# Altium PCB PCB1.PcbDoc
Units mm, origin at the board's own origin, x right, y up, seen from the top; angles counter-clockwise.
Board outline 44.5 x 47.5 mm, 2 copper layers (Top Layer, Bottom Layer); 62 components, 63 nets, 204 pads, 38 vias.
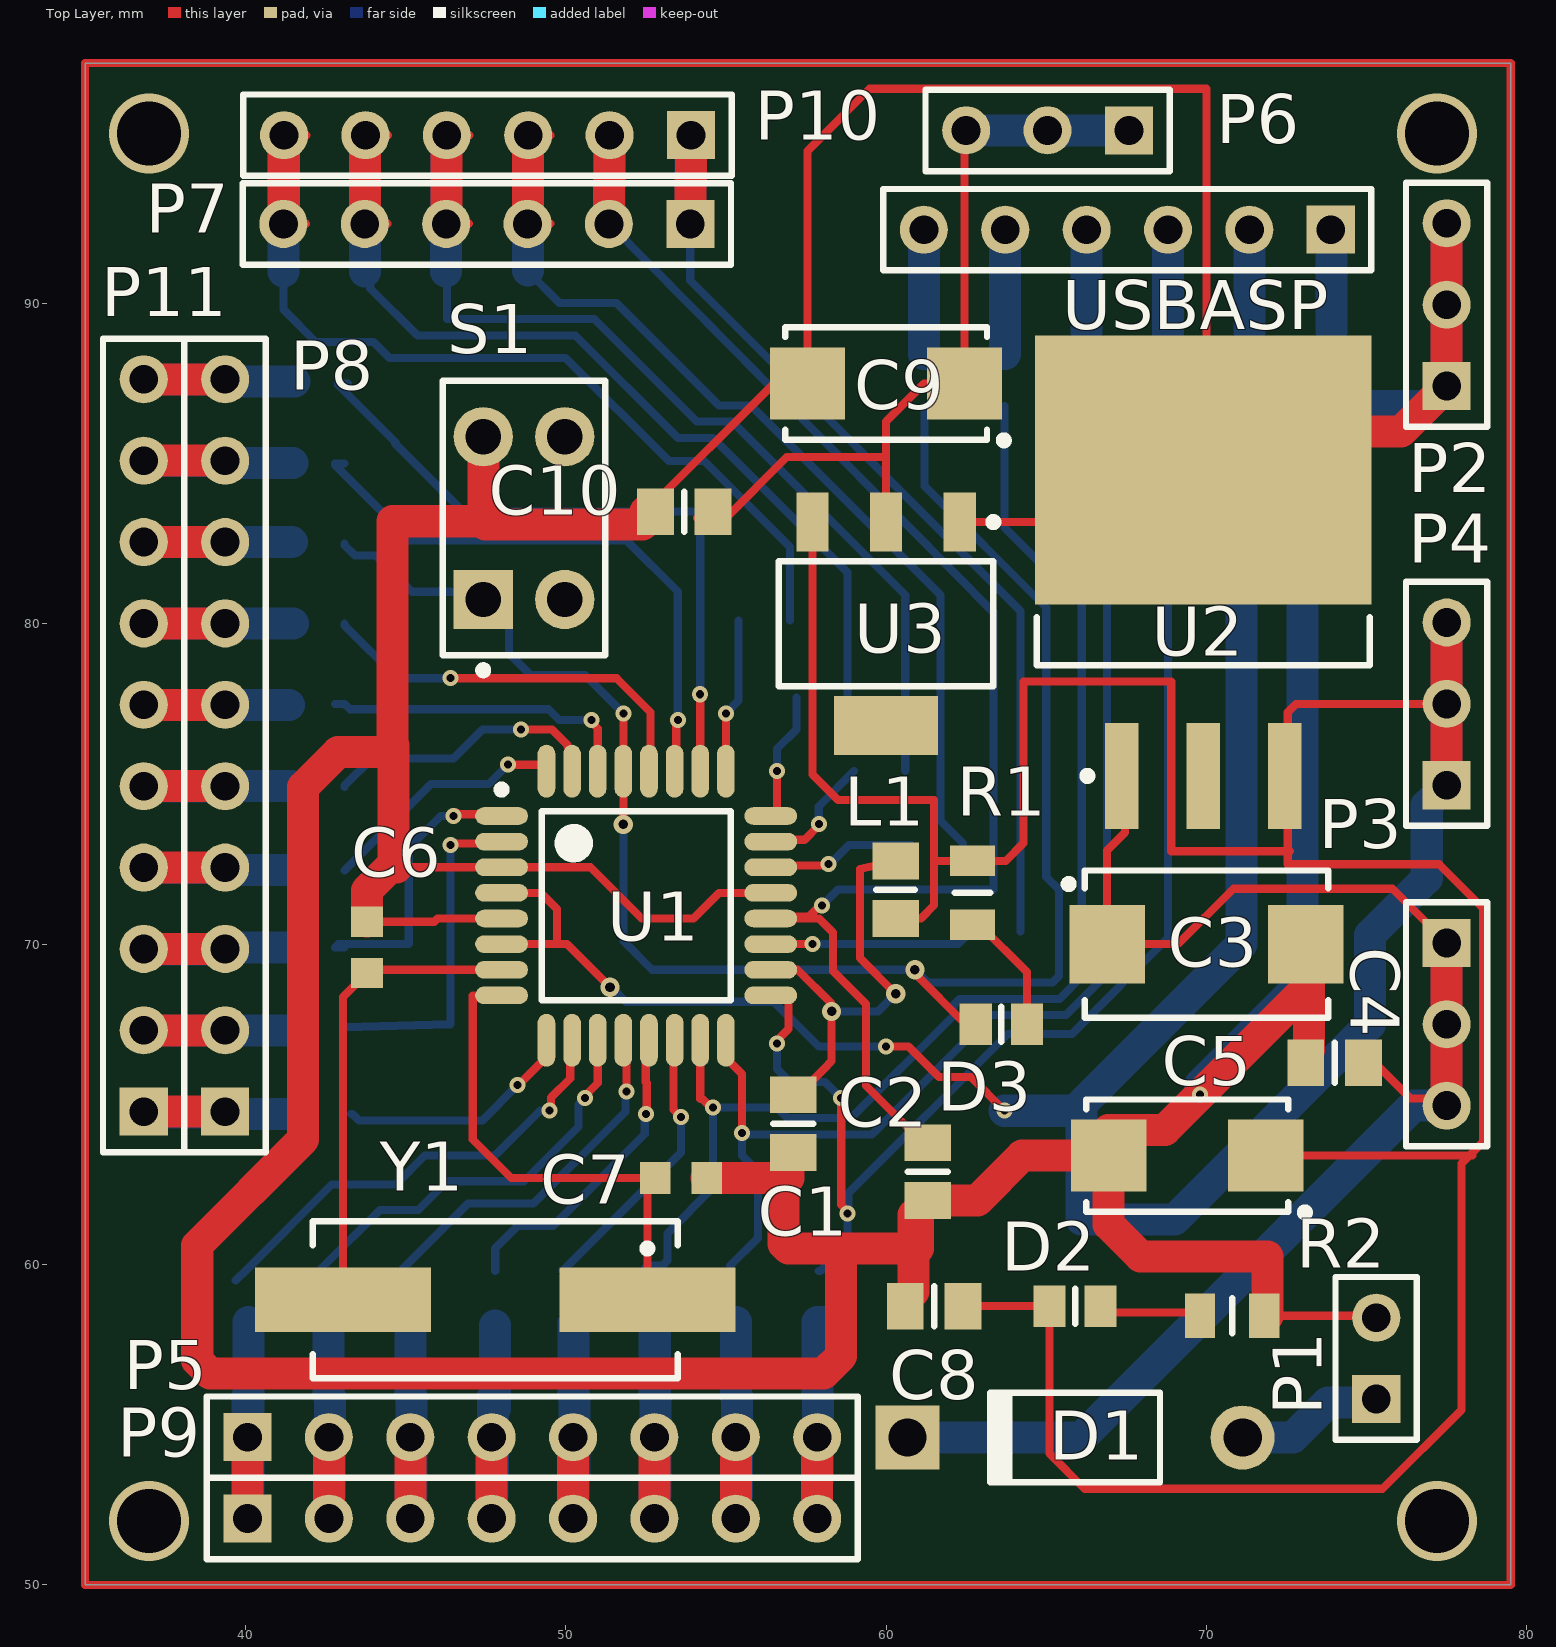
[diagram p0: Top Layer view]
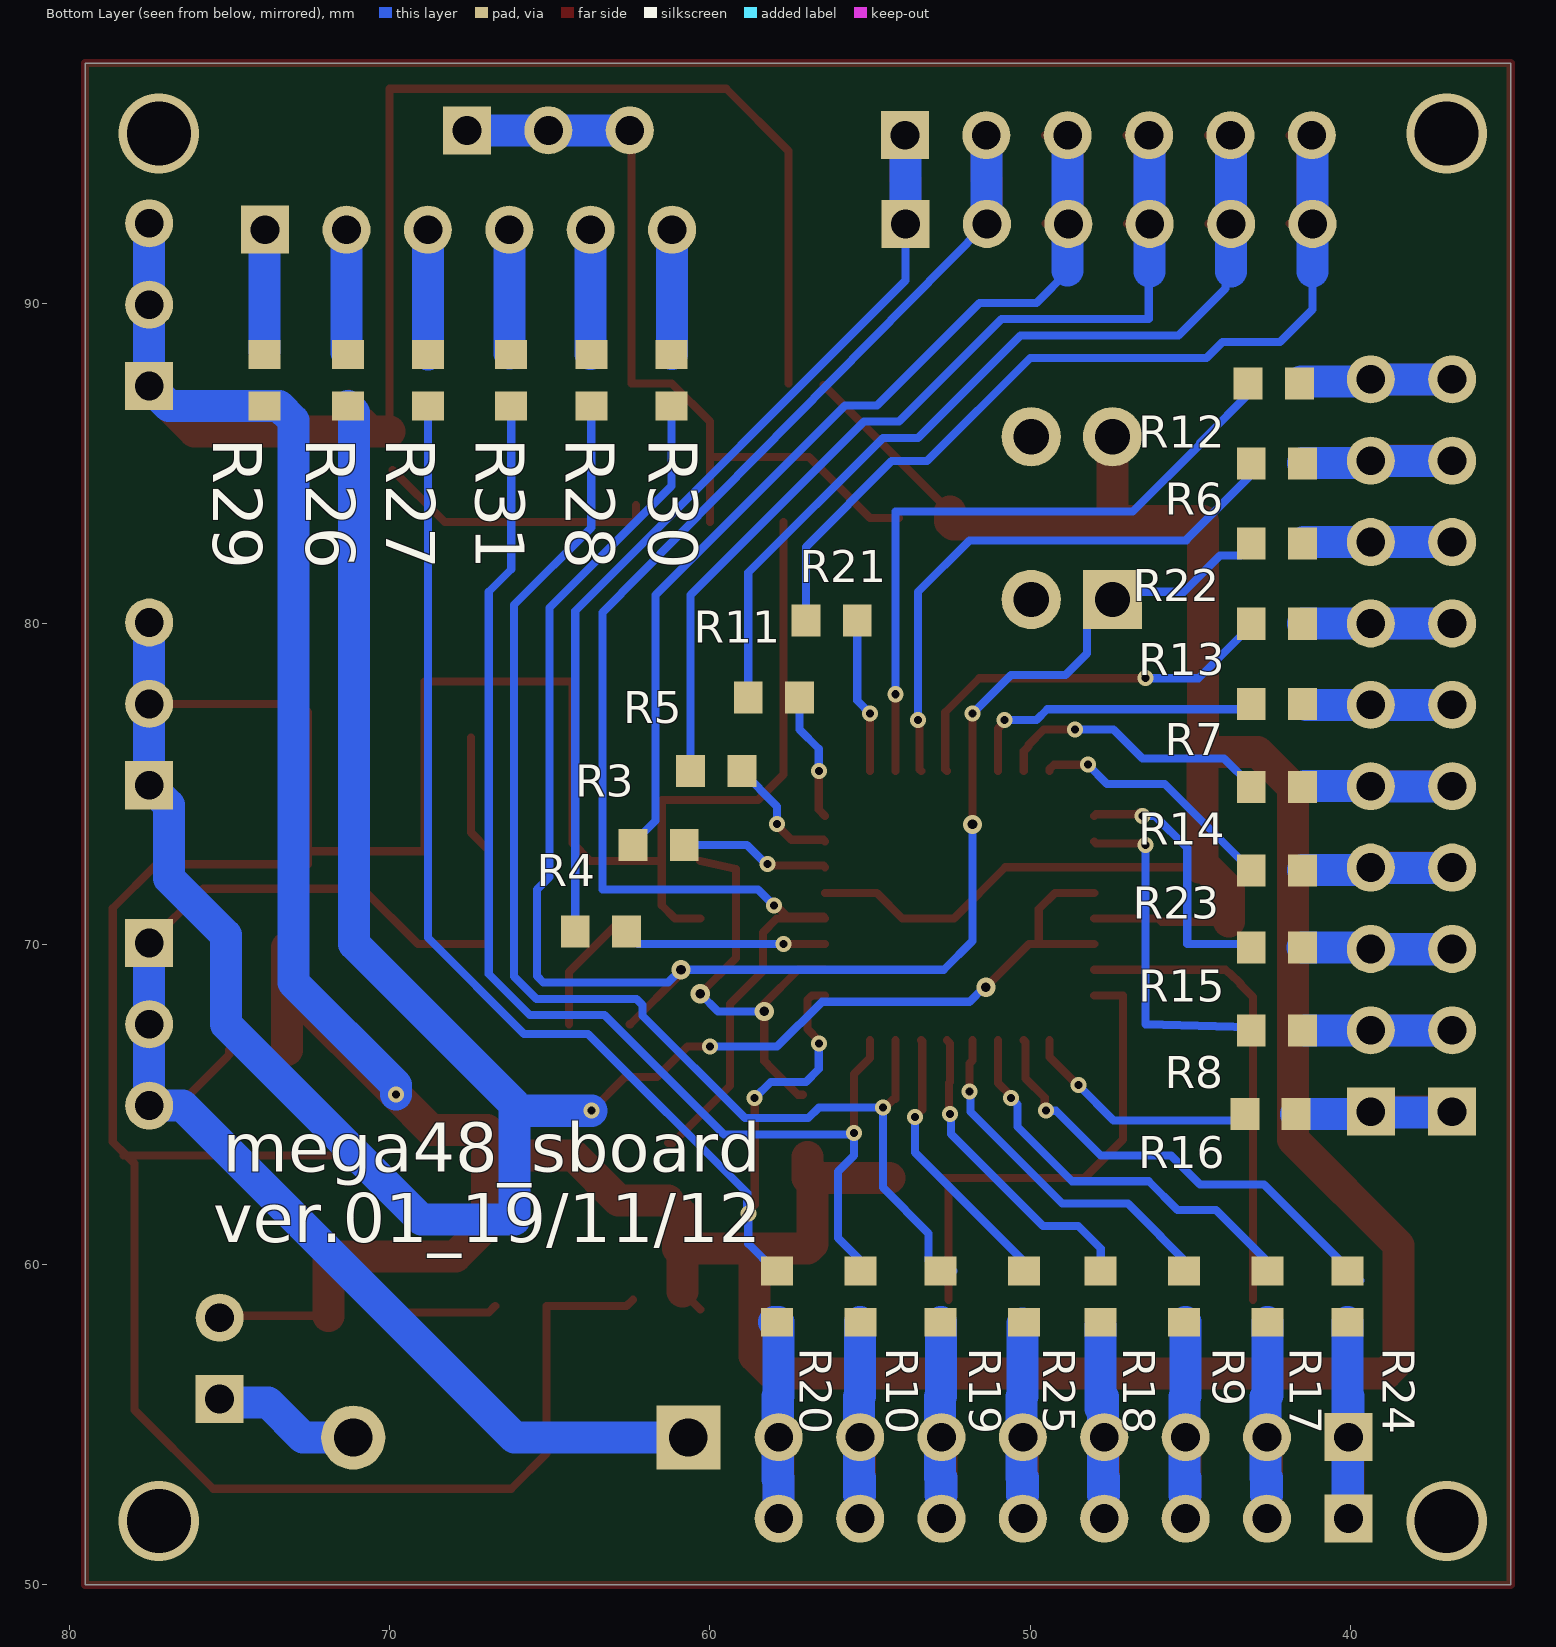
[diagram p1: Bottom Layer view, seen from below]
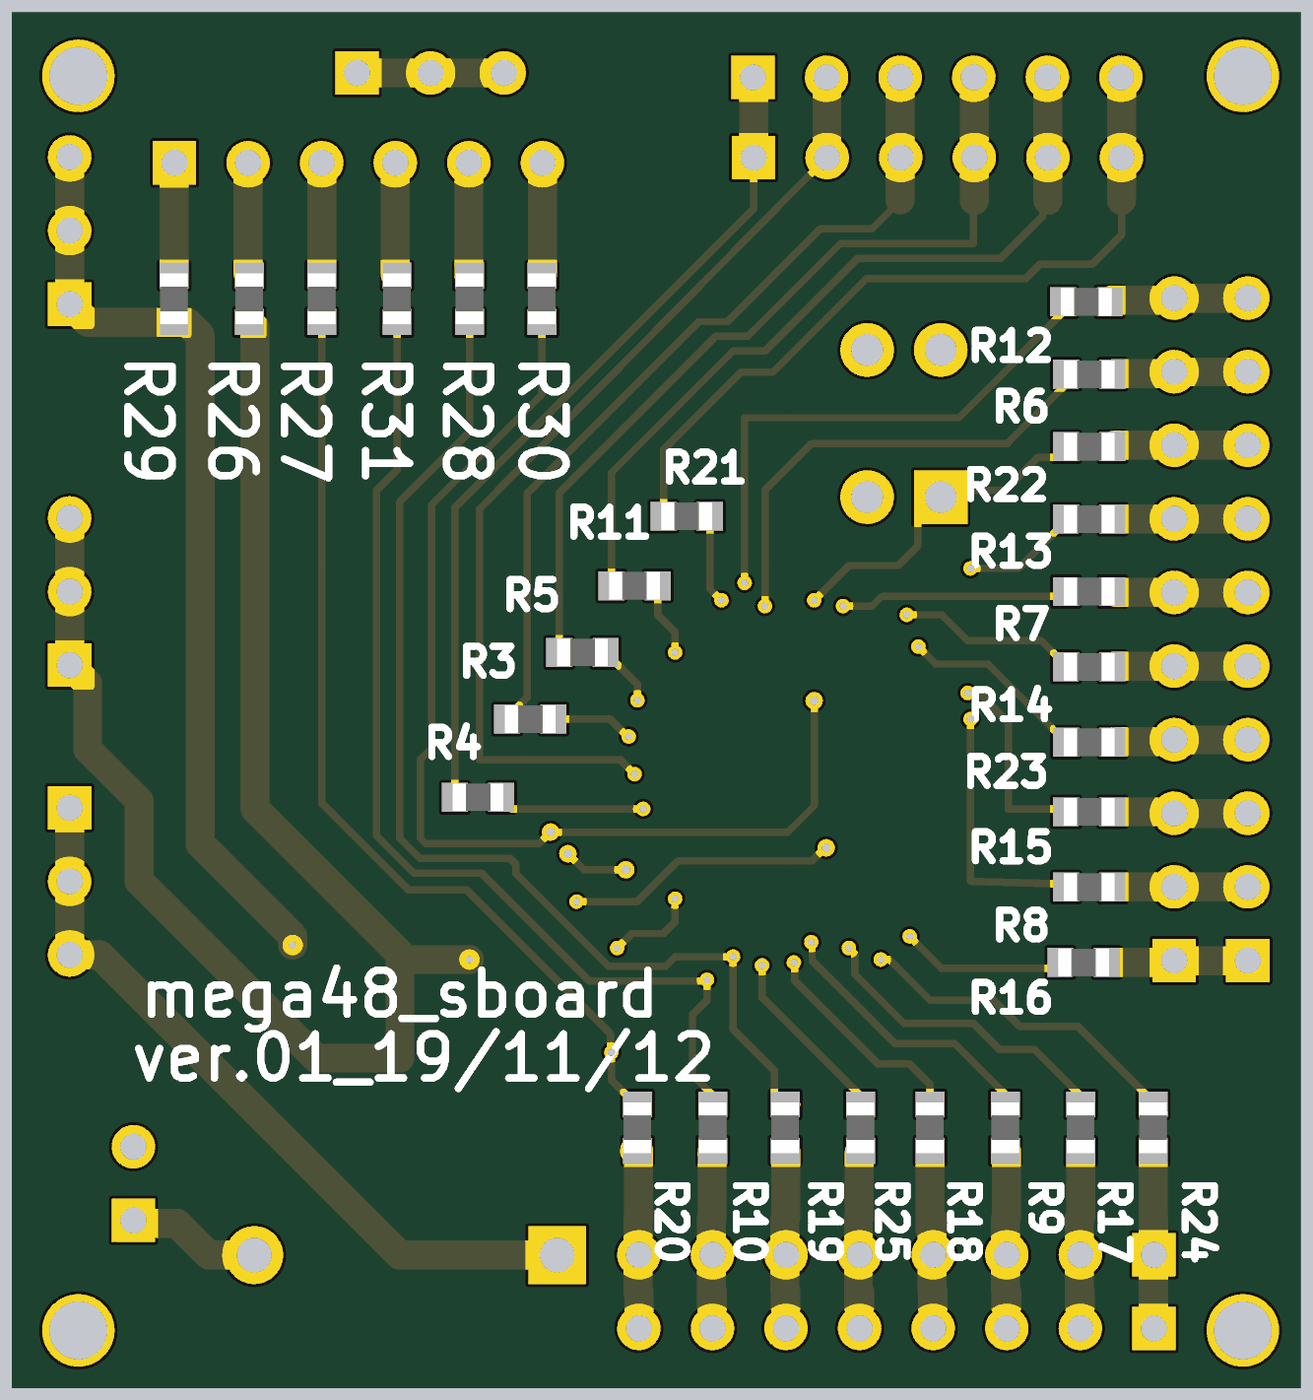
[diagram p2: 3D render of the assembled board from below, using the file's embedded part models]

## Layer stack, top to bottom
Top Solder: solder mask 0.0102, Solder Resist, Dk 3.5
Top Layer: signal copper 0.0356
Dielectric 1: dielectric 0.32, FR-4, Dk 4.8
Bottom Layer: signal copper 0.0356
Bottom Solder: solder mask 0.0102, Solder Resist, Dk 3.5

## Board outline
35,50 35,97.5 79.5,97.5 79.5,50

## Design rules (kind name [scope] priority, off if disabled: settings)
Clearance [All] p1: gap=0.254 ignorepadtopadclearanceinfootprint=FALSE except(0: Arc-Hole Track-Hole SMDPad-Hole THPad-Hole Via-Hole Fill-Hole Poly-Hole Region-Hole Text-Hole)
PolygonConnect [All] p1: connectstyle=Relief reliefconductorwidth=0.254 reliefentries=4 polygonreliefangle="90 Angle" airgapwidth=0.254
RoutingVias [All] p1: holewidth=0.711 width=1.27 viastyle="Through Hole" minholewidth=0.25 minwidth=0.5 maxholewidth=2.5 maxwidth=3
SolderMaskExpansion [All] p1: expansion=0.102
Width [All] p1: maxlimit=1.5 minlimit=0.254 preferedwidth=0.254
30 further rules are at their usual default settings.

## Components (designator, comment, footprint, x,y, rotation, side; value= is the part's Value field where it differs from the comment)
C1 "150nF" CAPC2013X100N 57.1,64.4 r270 top
C2 "150nF" CAPC2013X100N 61.3,62.9 r270 top
C3 "33uF" CAPMP7343X310N 70,70 r0 top
C4 "150nF" CAPC2013X100N 74,66.3 r180 top
C5 "47uF" CAPMP6032X280N 69.4,63.4 r180 top
C6 "22pF" CAPC1608X87N 43.8,69.9 r90 top
C7 "22pF" CAPC1608X87N 53.6,62.7 r0 top
C8 "150nF" CAPC2013X100N 61.5,58.7 r180 top
C9 "47uF" CAPMP6032X280N 60,87.5 r180 top
C10 "150nF" CAPC2013X100N 53.7,83.5 r180 top
D1 "1N4007" DO-41 65.9,54.6 r180 top
D2 "LED2" 6-0805_L 65.9,58.7 r0 top
D3 "LED2" 6-0805_L 63.6,67.5 r180 top
L1 "10uH" INDC2012X105N 60.3,71.7 r270 top
P1 "Header 2" HDR1X2 75.3,55.8 r90 top
P2 "Header 3" HDR1X3 77.5,87.42 r90 top
P3 "Header 3" HDR1X3 77.5,70.04 r270 top
P4 "Header 3" HDR1X3 77.5,74.96 r90 top
P5 "Header 8" HDR1X8 40.07,54.61 r0 top
P6 "Header 3" HDR1X3 67.58,95.4 r180 top
P7 "Header 6" HDR1X6 53.89,92.48 r180 top
P8 "Header 10" HDR1X10 39.37,64.77 r90 top
P9 "Header 8" HDR1X8 40.07,52.07 r0 top
P10 "Header 6" HDR1X6 53.91,95.25 r180 top
P11 "Header 10" HDR1X10 36.83,64.77 r90 top
R1 "3k3" RESC2012X60N 62.7,71.6 r90 top
R2 "3k3" RESC2012X60N 70.8,58.4 r0 top
R3 "100" RESC1608X55N 61.6,73.1 r0 bottom
R4 "100" RESC1608X55N 63.4,70.4 r0 bottom
R5 "100" RESC1608X55N 59.8,75.4 r0 bottom
R6 "100" RESC1608X55N 42.3,85 r180 bottom
R7 "100" RESC1608X55N 42.3,77.5 r180 bottom
R8 "100" RESC1608X55N 42.3,67.3 r180 bottom
R9 "100" RESC1608X55N 45.2,59 r270 bottom
R10 "100" RESC1608X55N 55.3,59 r270 bottom
R11 "100" RESC1608X55N 58,77.7 r0 bottom
R12 "100" RESC1608X55N 42.4,87.5 r180 bottom
R13 "100" RESC1608X55N 42.3,80 r180 bottom
R14 "100" RESC1608X55N 42.3,74.9 r180 bottom
R15 "100" RESC1608X55N 42.3,69.9 r180 bottom
R16 "100" RESC1608X55N 42.5,64.7 r180 bottom
R17 "100" RESC1608X55N 42.6,59 r270 bottom
R18 "100" RESC1608X55N 47.8,59 r270 bottom
R19 "100" RESC1608X55N 52.8,59 r270 bottom
R20 "100" RESC1608X55N 57.9,59 r270 bottom
R21 "100" RESC1608X55N 56.2,80.1 r0 bottom
R22 "100" RESC1608X55N 42.3,82.5 r180 bottom
R23 "100" RESC1608X55N 42.3,72.3 r180 bottom
R24 "100" RESC1608X55N 40.1,59 r270 bottom
R25 "100" RESC1608X55N 50.2,59 r270 bottom
R26 "1R8" RESC1608X55N 71.3,87.6 r90 bottom
R27 "10" RESC1608X55N 68.8,87.6 r90 bottom
R28 "10" RESC1608X55N 63.7,87.6 r90 bottom
R29 "1R8" RESC1608X55N 73.9,87.6 r90 bottom
R30 "10" RESC1608X55N 61.2,87.6 r90 bottom
R31 "10" RESC1608X55N 66.2,87.6 r90 bottom
S1 "SW-DPST" DPST-4 48.7,83.3 r90 top
U1 "ATmega48-20AU" 32A_N 52.2,71.2 r0 top
U2 "78M05" TS3B_N 69.9,81.3 r90 top
U3 "AMS1117" ADI-KC-3_N 60,80 r270 top
USBASP "Header 6" HDR1X6 73.88,92.3 r180 top
Y1 "HC49/4H_SMX" HC49/4H_SMX 47.8,58.9 r180 top

## Footprints (in the part's own frame and the unit in brackets; to place one, negate y for a bottom-side part, rotate by r counter-clockwise, add the part's x,y. Pads: shape width x height; smd on the part's side, far side on the other; paste and mask are expansions set on the pad)
6-0805_L [mm] "Chip Resistor, Body 2.0x1.2mm, IPC High Density"
  rect 1x1.3 smd: 1(-0.8,0) 2(0.8,0)
  silkscreen extent 0,-0.55 0,0.55, body extent -1.07,-0.7 1.07,0.7, height 0.7
32A_N [mm] "Thin QFP, 32-Leads, Body 7x7mm, Pitch 0.8mm, IPC Medium Density"
  oval 1.65x0.55 smd: 1(-4.2,2.8) 2(-4.2,2) 3(-4.2,1.2) 4(-4.2,0.4) 5(-4.2,-0.4) 6(-4.2,-1.2) 7(-4.2,-2) 8(-4.2,-2.8) 17(4.2,-2.8) 18(4.2,-2) 19(4.2,-1.2) 20(4.2,-0.4) 21(4.2,0.4) 22(4.2,1.2) 23(4.2,2) 24(4.2,2.8)
  oval 0.55x1.65 smd: 9(-2.8,-4.2) 10(-2,-4.2) 11(-1.2,-4.2) 12(-0.4,-4.2) 13(0.4,-4.2) 14(1.2,-4.2) 15(2,-4.2) 16(2.8,-4.2) 25(2.8,4.2) 26(2,4.2) 27(1.2,4.2) 28(0.4,4.2) 29(-0.4,4.2) 30(-1.2,4.2) 31(-2,4.2) 32(-2.8,4.2)
  silkscreen extent -4.32,-2.95 2.95,3.75, body extent -3.5,-3.5 3.5,3.5, height 1.2
ADI-KC-3_N [mm] "SOT223, 4-Leads, Body 6.5x3.5mm, Pitch 2.3mm, IPC Medium Density"
  rect 1.85x1 smd: 1(-3.175,2.3) 2(-3.175,0) 3(-3.175,-2.3)
  rect 1.85x3.25 smd: 4(3.175,0)
  silkscreen extent -3.3,-3.35 1.95,3.48, body extent -1.85,-3.35 1.85,3.35, height 1.8
CAPC1608X87N [mm] "Chip Capacitor, Body 1.6x0.8mm IPC Medium Density"
  rect 0.95x1 smd: 1(-0.8,0) 2(0.8,0)
  body extent -0.87,-0.47 0.88,0.48, height 0.87
CAPC2013X100N [mm] "Capacitor, Non-Polarized, Chip; 2.00mm L X 1.25mm W X 0.9mm H, IPC Medium Density"
  rect 1.15x1.45 smd: 1(-0.9,0) 2(0.9,0)
  silkscreen extent 0,-0.63 0,0.62, body extent -1.1,-0.72 1.1,0.73, height 1
CAPMP6032X280N [mm] "Capacitor, Polarized, Molded  Body 6.0x3.2mm, IPC Medium Density"
  rect 2.35x2.25 smd: 1(-2.45,0) 2(2.45,0)
  silkscreen extent -3.8,-1.75 3.15,1.9, body extent -3.15,-1.75 3.15,1.75, height 2.8
CAPMP7343X310N [mm] "Capacitor, Polarized, Molded  Body 7.3x4.3mm, IPC Medium Density"
  rect 2.35x2.45 smd: 1(-3.1,0) 2(3.1,0)
  silkscreen extent -4.42,-2.3 3.8,2.3, body extent -3.8,-2.3 3.8,2.3, height 3.1
DO-41 [mm] "Diode, Axial; Body 5.2 x 2.7 mm (LxDia. max), Lead Dia. 0.86 mm (max)"
  round 2 hole 1.2: 1(-5.23,0)
  rect 2x2 hole 1.2: 2(5.23,0)
  silkscreen extent -2.65,-1.4 2.75,1.4
DPST-4 [mm] "Switch; 4 Leads"
  rect 1.85x1.85 hole 1.1: 1(-2.54,1.27)
  round 1.85 hole 1.1: 2(-2.54,-1.27) 3(2.54,-1.27) 4(2.54,1.27)
  silkscreen extent -4.88,-2.54 4.28,2.54
HC49/4H_SMX [mm] "Surface Mount Quartz Crystal; Body 13.4 (inc. leads) x 4.9 mm (LxW max)"
  rect 5.5x2 smd: 1(-4.75,0) 2(4.75,0)
  silkscreen extent -5.7,-2.45 5.7,2.45
HDR1X2 [mm] "Connector; Header; 2 Position"
  rect 1.5x1.5 hole 0.9: 1(0,0)
  round 1.5 hole 0.9: 2(2.54,0)
  silkscreen extent -1.27,-1.27 3.81,1.27
HDR1X3 [mm] "Connector; Header; 3 Position"
  rect 1.5x1.5 hole 0.9: 1(0,0)
  round 1.5 hole 0.9: 2(2.54,0) 3(5.08,0)
  silkscreen extent -1.27,-1.27 6.35,1.27
HDR1X6 [mm] "Connector; Header; 6 Position"
  rect 1.5x1.5 hole 0.9: 1(0,0)
  round 1.5 hole 0.9: 2(2.54,0) 3(5.08,0) 4(7.62,0) 5(10.16,0) 6(12.7,0)
  silkscreen extent -1.27,-1.27 13.97,1.27
HDR1X8 [mm] "Connector; Header; 8 Position"
  rect 1.5x1.5 hole 0.9: 1(0,0)
  round 1.5 hole 0.9: 2(2.54,0) 3(5.08,0) 4(7.62,0) 5(10.16,0) 6(12.7,0) 7(15.24,0) 8(17.78,0)
  silkscreen extent -1.27,-1.27 19.05,1.27
HDR1X10 [mm] "Connector; Header; 10 Position"
  rect 1.5x1.5 hole 0.9: 1(0,0)
  round 1.5 hole 0.9: 2(2.54,0) 3(5.08,0) 4(7.62,0) 5(10.16,0) 6(12.7,0) 7(15.24,0) 8(17.78,0) 9(20.32,0) 10(22.86,0)
  silkscreen extent -1.27,-1.27 24.13,1.27
INDC2012X105N [mm] "Chip Inductor, EIA 0805, Metric 2012, Body 2.0x1.25mm, IPC Medium Density"
  rect 1.15x1.45 smd: 1(-0.9,0) 2(0.9,0)
  silkscreen extent 0,-0.6 0,0.6, body extent -1.1,-0.7 1.1,0.7, height 1.1
RESC1608X55N [mm] "Chip Resistor, EIA 0603, Metric 1608, Body 1.6x0.8mm, IPC Medium Density"
  rect 0.9x1 smd: 1(-0.8,0) 2(0.8,0)
  body extent -0.87,-0.47 0.88,0.48, height 0.55
RESC2012X60N [mm] "Chip Resistor, EIA 0805, Metric 2012, Body 2.0x1.2mm, IPC Medium Density"
  rect 0.95x1.4 smd: 1(-1,0) 2(1,0)
  silkscreen extent 0,-0.55 0,0.55, body extent -1.1,-0.67 1.1,0.68, height 0.6
TS3B_N [mm] "D2-PAK, 4-Leads, Body 8.6x10.2mm, Pitch 2.54mm, Lead Span 14.2mm, IPC Medium Density"
  rect 3.3x1.05 smd: 1(-6.05,2.54) 2(-6.05,0) 3(-6.05,-2.54)
  rect 8.4x10.5 smd: 4(3.5,0)
  silkscreen extent -6.17,-5.2 -1.1,5.2, body extent -2.6,-5.2 6.29,5.2, height 4.64

## Part data
C1 C2 C4 C8 C10: library part CC0805_150NF_50V_10%_X5R, "Non-polarised capacitor", Case=0805, Manufacturer=GENERIC, Manufacturer1 ComponentHeight=1mm, Manufacturer1 Example=TDK, Manufacturer1 Part Number=C2012X5R1H154K085AA, Tolerance=±10%, Voltage=50V, Author="CERN DEM JLC", Component Type=Standard, CreateDate=11.12.2014, HelpURL=\\cern.ch\dfs\Applications\Altium\Datasheets\CC0805_X5R_TDK_C.pdf, LatestRevisionDate=11.12.2014, Manufacturer Part Number=CC0805_150NF_50V_10%_X5R, Mounted=Yes, Part Description="SMD Multilayer Chip Ceramic Capacitor", Part Number=CC0805_150NF_50V_10%_X5R, Pin Count=2, Sense=No, SMD=Yes, Socket=No, Status="Not Recommended", TC=X5R
C3: library part CTE7343-31_33UF_35V_10%_LESR0300, "Polarised capacitor", Case=D, Manufacturer=GENERIC, Manufacturer1 ComponentHeight=3.1mm, Manufacturer1 Example=AVX, Manufacturer1 Part Number=TPSD336K035R0300, Tolerance=±10%, Voltage=35V, Author="CERN DEM JLC", Component Type=Standard, CreateDate=05.05.2008, HelpURL=\\cern.ch\dfs\Applications\Altium\Datasheets\CTE-LESR_AVX_TPS.pdf, LatestRevisionDate=20.01.2009, Manufacturer Part Number=CTE7343-31_33UF_35V_10%_LESR0300, Mounted=Yes, Part Description="Low ESR 0R3 Solid Tantalum Chip Capacitor", Part Number=CTE7343-31_33UF_35V_10%_LESR0300, Pin Count=2, Sense=No, SMD=Yes, Socket=No, Status=Preferred
C5 C9: library part CTE6032-28_47UF_10V_10%, "Polarised capacitor", Case=C, Manufacturer=GENERIC, Manufacturer1 ComponentHeight=2.8mm, Manufacturer1 Example=AVX, Manufacturer1 Part Number=TAJC476K010RNJ, Tolerance=±10%, Voltage=10V, Author="CERN DEM JLC", Component Type=Standard, CreateDate=03.07.2013, HelpURL=\\cern.ch\dfs\Applications\Altium\Datasheets\CTE_AVX_TAJ.pdf, LatestRevisionDate=03.07.2013, Manufacturer Part Number=CTE6032-28_47UF_10V_10%, Mounted=Yes, Part Description="Solid Tantalum Chip Capacitor", Part Number=CTE6032-28_47UF_10V_10%, Pin Count=2, Sense=No, SMD=Yes, Socket=No, Status=Preferred
C6 C7: library part CC0603_22PF_50V_5%_NP0, "Non-polarised capacitor", Case=0603, Manufacturer=GENERIC, Manufacturer1 ComponentHeight=0.87mm, Manufacturer1 Example=PHYCOMP, Manufacturer1 Part Number=223886715229, Tolerance=±5%, Voltage=50V, Author="CERN DEM JLC", Component Type=Standard, CreateDate=03.12.2007, HelpURL=\\cern.ch\dfs\Applications\Altium\Datasheets\CC0603_NP0_PHYCOMP.pdf, LatestRevisionDate=03.12.2007, Manufacturer Part Number=CC0603_22PF_50V_5%_NP0, Mounted=Yes, Part Description="SMD Multilayer Chip Ceramic Capacitor", Part Number=CC0603_22PF_50V_5%_NP0, Pin Count=2, Sense=No, SMD=Yes, Socket=No, Status=Preferred, TC=C0G/NP0
D1: "1.0 Ampere General Purpose Rectifier", PackageDocument=Aug-1999, Code_JEDEC=DO-204-AL, ComponentLink1Description="Manufacturer Link", ComponentLink1URL=http://www.fairchildsemi.com/, ComponentLink2Description="Pinout Specification", ComponentLink2URL=http://www.fairchildsemi.com/ds/1N%2F1N4001.pdf, DatasheetDocument=1998, LatestRevisionDate=17-Jul-2002, LatestRevisionNote="Re-released for DXP Platform.", PackageReference=DO-41, Published=8-Jun-2000, Publisher="Altium Limited"
D2 D3: "Typical RED, GREEN, YELLOW, AMBER GaAs LED", LatestRevisionDate=17-Jul-2002, LatestRevisionNote="Re-released for DXP Platform.", PackageDescription="SM LED; 2 Flat Leads", PackageReference=3.2X1.6X1.1, PackageVersion=Feb-2002, Published=8-Jun-2000, Publisher="Altium Limited"
L1: library part IND_10UH_10%_MURATA-PS_8200, "Inductor With Core", Manufacturer="MURATA POWER SOLUTIONS", Manufacturer Part Number=82103C, Power=500mA, Resistance=0.4R, Tolerance=±10%, Author="CERN DEM JLC", ComponentHeight=2.3mm, Component Type=Standard, CreateDate=21.07.2014, HelpURL=\\cern.ch\dfs\Applications\Altium\Datasheets\IND_MURATA-PS_8200.pdf, LatestRevisionDate=21.07.2014, Mounted=Yes, Part Description="Miniature Surface Mount Power Inductor (8200 Series)", Part Number=IND_10UH_10%_MURATA-PS_8200, Pin Count=2, Sense=No, SMD=Yes, Socket=No, Status=None
P1: "Header, 2-Pin", LatestRevisionDate=17-Jul-2002, LatestRevisionNote="Re-released for DXP Platform.", Publisher="Altium Limited"
P2 P3 P4 P6: "Header, 3-Pin", LatestRevisionDate=17-Jul-2002, LatestRevisionNote="Re-released for DXP Platform.", Publisher="Altium Limited"
P5 P9: "Header, 8-Pin", LatestRevisionDate=17-Jul-2002, LatestRevisionNote="Re-released for DXP Platform.", Publisher="Altium Limited"
P7 P10 USBASP: "Header, 6-Pin", LatestRevisionDate=17-Jul-2002, LatestRevisionNote="Re-released for DXP Platform.", Publisher="Altium Limited"
P8 P11: "Header, 10-Pin", LatestRevisionDate=17-Jul-2002, LatestRevisionNote="Re-released for DXP Platform.", Publisher="Altium Limited"
R1 R2: library part R0805_3K3_1%_0.125W_100PPM, "Resistor - 1%", Case=0805, Manufacturer=GENERIC, Manufacturer1 ComponentHeight=0.6mm, Manufacturer1 Example="NIC COMPONENT", Manufacturer1 Part Number=NRC10F3301TRF, Power=0.125W, Tolerance=±1%, Author="CERN DEM JLC", Component Type=Standard, CreateDate=03.12.2007, HelpURL=\\cern.ch\dfs\Applications\Altium\Datasheets\R0805_NIC_NRC.pdf, LatestRevisionDate=13.03.2008, Manufacturer Part Number=R0805_3K3_1%_0.125W_100PPM, Mounted=Yes, Part Description="General Purpose Thick Film Chip Resistor", Part Number=R0805_3K3_1%_0.125W_100PPM, Pin Count=2, Sense=No, SMD=Yes, Socket=No, Status=Preferred, TC=±100ppm/°C
R3 R4 R5 R6 R7 R8 R9 R10 R11 R12 R13 R14 R15 R16 R17 R18 R19 R20 R21 R22 R23 R24 R25: library part R0603_100R_1%_0.1W_100PPM, "Resistor - 1%", Case=0603, Manufacturer=GENERIC, Manufacturer1 ComponentHeight=0.55mm, Manufacturer1 Example="NIC COMPONENT", Manufacturer1 Part Number=NRC06F4700TRF, Power=0.1W, Tolerance=±1%, Author="CERN DEM JLC", Component Type=Standard, CreateDate=03.12.2007, HelpURL=\\cern.ch\dfs\Applications\Altium\Datasheets\R0603_NIC_NRC.pdf, LatestRevisionDate=13.03.2008, Manufacturer Part Number=R0603_100R_1%_0.1W_100PPM, Mounted=Yes, Part Description="General Purpose Thick Film Chip Resistor", Part Number=R0603_100R_1%_0.1W_100PPM, Pin Count=2, Sense=No, SMD=Yes, Socket=No, Status=Preferred, TC=±100ppm/°C
R26 R29: library part R0603_1R8_1%_0.1W_200PPM, "Resistor - 1%", Case=0603, Manufacturer=GENERIC, Manufacturer1 ComponentHeight=0.65mm, Manufacturer1 Example="YAGEO PHYCOMP", Manufacturer1 Part Number="232270461808L or RC0603FR-071R8L", Power=0.1W, Tolerance=±1%, Author="CERN DEM JLC", Component Type=Standard, CreateDate=03.12.2007, HelpURL=\\cern.ch\dfs\Applications\Altium\Datasheets\R0603_Phycomp_RC0603.pdf, LatestRevisionDate=17.10.2012, Manufacturer Part Number=R0603_1R8_1%_0.1W_200PPM, Mounted=Yes, Part Description="General Purpose Thick Film Chip Resistor", Part Number=R0603_1R8_1%_0.1W_200PPM, Pin Count=2, Sense=No, SMD=Yes, Socket=No, Status=Preferred, TC=±200ppm/°C
R27 R28 R30 R31: library part R0603_10R_1%_0.1W_200PPM, "Resistor - 1%", Case=0603, Manufacturer=GENERIC, Manufacturer1 ComponentHeight=0.55mm, Manufacturer1 Example="NIC COMPONENT", Manufacturer1 Part Number=NRC06F10R0TRF, Power=0.1W, Tolerance=±1%, Author="CERN DEM JLC", Component Type=Standard, CreateDate=03.12.2007, HelpURL=\\cern.ch\dfs\Applications\Altium\Datasheets\R0603_NIC_NRC.pdf, LatestRevisionDate=24.06.2009, Manufacturer Part Number=R0603_10R_1%_0.1W_200PPM, Mounted=Yes, Part Description="General Purpose Thick Film Chip Resistor", Part Number=R0603_10R_1%_0.1W_200PPM, Pin Count=2, Sense=No, SMD=Yes, Socket=No, Status=Preferred, TC=±200ppm/°C
S1: "Double-Pole, Single-Throw Switch", LatestRevisionDate=17-Jul-2002, LatestRevisionNote="Re-released for DXP Platform.", PackageDescription="Switch; 4 Leads", PackageReference=DPST-4, Published=24-Mar-1999, Publisher="Altium Limited"
U1: "8-bit AVR Microcontroller, 2.7-5.5V, 20MHz, 4KB Flash, 256 Bytes EEPROM, 512 Bytes SRAM, 32-pin TQFP, Industrial Grade (-40°C to 85°C)", Code_JEDEC=MS-026-ABA, ComponentLink1Description="Manufacturer URL", ComponentLink1URL=http://www.atmel.com/, ComponentLink2Description="ATmega48/88/168 Datasheet", ComponentLink2URL=http://www.atmel.com/dyn/resources/prod_documents/doc2545.pdf, ComponentLink3Description="ATmega48/88/168 Summary", ComponentLink3URL=http://www.atmel.com/dyn/resources/prod_documents/2545S.pdf, DatasheetVersion="revT, May-2011", PackageDescription="32-Lead, 7x7x1.0 mm Body, 0.8mm Lead Pitch, Thin Profile Plastic Quad Flat Package (TQFP)", PackageReference=32A, PackageVersion="revC, Oct-2010"
U2: library part LM340S-5.0, "Series 3-Terminal Positive Regulators, 3-pin TO-263", Manufacturer="National Semiconductor", PackageTopMarking="NSUZXYTTE#*LM340S*-5.0 P+", PowerWise=N, Code_JEDEC=MO-169-AA, ComponentLink1Description="Manufacturer URL", ComponentLink1URL=http://www.national.com/, ComponentLink2Description="LM340 Datasheet", ComponentLink2URL=http://www.national.com/ds/LM/LM340.pdf, ComponentLink3Description="LM340 Web Page", ComponentLink3URL=http://www.national.com/pf/LM/LM340.html, ComponentLink4Description="TS3B Package Page", ComponentLink4URL=http://www.national.com/packaging/folders/ts3b.html, CompType="LDO IC", DatasheetVersion=Jul-2006, High-Reliability=Y, PackageDescription="TO-263, Molded, .400 x .390 x .180in, 3 Lead, .1in Pitch, Surface Mount", PackageReference=TS3B, PackageVersion="revF, Apr-2005", PartNumber=LM340S-5.0, PinCount=3, RoHS=N
U3: library part ADP3338AKCZ-3.3-RL, "High Accuracy, Ultralow IQ, 1 A, anyCAP(R) Low Dropout Regulator, 2.7 to 8 V Vin, 3.3 V Vout, Industrial, 3-pin SOT223 (KC-3), Reel", Manufacturer="Analog Devices", Preset Vout Values (V)=3.3, Supplier Part Number 1=ADP3338AKCZ-3.3-RLTR-ND, Supply Current IGND @ Small Load=110uA, Code_JEDEC=TO-261-AA, ComponentLink1Description="Manufacturer URL", ComponentLink1URL=http://www.analog.com/en/index.html, ComponentLink2Description=Datasheet, ComponentLink2URL=http://www.analog.com/static/imported-files/data_sheets/ADP3338.pdf, ComponentLink3Description="Package Specification", ComponentLink3URL=http:/www.analog.com/static/imported-files/packages/PKG_PDF/SOT_223(KC)/KC_3.pdf, ComponentLink4Description="URL Link1", ComponentLink4URL="Product URL:http://www.analog.com/en/ADP3338/productSearch.html", DatasheetVersion="Rev. B", Iout max=1A, Mounting Technology="Surface Mount", PackageDescription="3-Pin Small Outline Transistor Package, Body 3.5 x 6.5 mm, Pitch 2.3 mm", PackageReference=KC-3, PackageVersion="11-20-2012-B, 11/2012", Packing=Reel, PartNumber=ADP3338AKCZ-3.3-RL, Supplier 1=Digi-Key, Supplier 2=Digi-Key, Supplier 3=Digi-Key, Supplier 4=Newark, Supplier 5=Mouser, Supplier Part Number 2=ADP3338AKCZ-3.3-RLCT-ND, Supplier Part Number 3=ADP3338AKCZ-3.3-RLDKR-ND, Supplier Part Number 4=59K2619, Supplier Part Number 5=584-ADP3338AKCZ3.3R, Vin (max) (V)=8, Vin (min) (V)=2.7
Y1: "Surface Mount Quartz Crystal", PackageDocument=18-Oct-1999, ComponentLink1Description="Manufacturer Link", ComponentLink1URL=http://www.cmac.com/mt/, ComponentLink2Description=Datasheet, ComponentLink2URL=http://www.cmac.com/mt/databook/crystals/smd/hc49_4h_smx.pdf, DatasheetDocument=18-Oct-1999, Note="PCB layout complies with manufacturer's recommendation.", PackageReference=HC49/4H_SMX, Published=17-Jul-2002, Publisher="Altium Limited"

## Via types
v1: diameter 0.5, hole 0.25, Top Layer to Bottom Layer, 29 vias
v2: diameter 0.6, hole 0.3, Top Layer to Bottom Layer, 5 vias
v3: diameter 2.5, hole 2, Top Layer to Bottom Layer, 4 vias

## Nets (pads, with @x,y where several pads share a name; then routed paths per layer and width w, separated by ;. In a path a pad name is that pad's centre, name@x,y a point inside that pad or via, vN(x,y) a via of type N, cw(c..) or ccw(c..) an arc to the next point about the centre after c; other vN are vias at no path point)
+5: C5.1 C8.1 D2.1 L1.2 P4.1 P4.2 P4.3 R1.2 R26.1 U1.4 U1.6 U2.3 U3.3 | length 180.1
  Top Layer w0.254: U1.6 49.7,70 ; U1.4 49.225,71.6 49.733,71.092 49.733,70.033 49.7,70 ; v2(51.384,68.656) 50.04,70 49.7,70 ; U3.3 57.7,75.3 58.5,74.5 61.5,74.5 61.5,72.6 ; v1(60,66.8) 60.7,66.8 61.65,65.85 62.65,65.85 v1(63.7,64.8) ; L1.2 61.086,70.8 61.5,71.214 61.5,72.6 ; C8.1@62.4,58.9 62.6,58.7 D2.1 65.1,54.1 66.2,53 75.5,53 77.962,55.462 77.962,63.154 78.208,63.4 ; C5.1 78.208,63.4 ; 72.54,72.87 72.54,72.9 ; P4.2 72.8,77.5 72.54,77.24 72.54,72.9 ; 78.3,63.4 78.208,63.4 ; 61.5,72.6 R1.2 63.735,72.6 64.287,73.152 64.287,78.2 68.9,78.2 68.9,72.9 72.54,72.9 ; 72.54,72.9 72.6,72.9 72.54,72.84 72.54,72.492 77.267,72.492 78.638,71.12 78.638,63.83 78.208,63.4
  Top Layer w1: P4.1 P4.2 P4.3
  Bottom Layer w0.254: v2(51.384,68.656) 51.435,68.656 51.891,68.2 56.5,68.2 57.9,66.8 v1(60,66.8) ; 65.9,64.8 66.1,65
  Bottom Layer w1: v1(63.7,64.8) 65.9,64.8 ; R26.1 71.1,86.6 71.1,70 66.1,65 66.1,61.4 69,61.4 75.1,67.5 75.1,70.28 76.877,72.057 76.877,74.337 P4.1 P4.2 P4.3
+12: C3.1 C4.1 D1.2 P3.1 P3.2 P3.3 U2.1 | length 63.2
  Top Layer w0.254: C4.1@75,66.7 C4.1@75,66.55 ; P3.3 77.279,65.181 76.369,65.181 ; P3.1 75.81,71.73 70.841,71.73 69.111,70 C3.1 66.9,72.923 67.46,73.483 ; 67.46,73.483 U2.1@67.46,76.45 ; 67.46,73.483 U2.1@67.46,76.45 ; 67.46,73.483 67.46,75.25 U2.1@67.46,76.45 ; C4.1@75,66.55 76.369,65.181 ; C4.1@75,66.55 C4.1@75.075,66.475 ; C4.1@75,66.55 C4.1@75.075,66.475 ; C4.1@75,66.55 C4.1@75.075,66.475 ; C4.1@75.075,66.475 76.369,65.181 ; C4.1@75.075,66.475 76.369,65.181
  Top Layer w1: P3.3 P3.2 P3.1
  Bottom Layer w1: D1.2 66.1,54.6 76.46,64.96 P3.3 P3.2 P3.1
GND: C1.2 C2.2 C3.2 C4.2 C5.2 C6.2 C7.2 C8.2 C9.2 C10.2 P1.2 P2.1 P2.2 P2.3 R2.2 R29.1 S1.4 U1.3 U1.5 U1.21 U2.4 U3.1 | length 229.2
  Top Layer w0.254: C6.2 45.9,70.7 46,70.8 U1.5 ; 44.3,76 44.6,75.7 ; 44.72,72.4 U1.3 50.779,72.4 52.375,70.805 53.993,70.805 54.789,71.6 U1.21 ; C10.2@52.5,83.5 C9.2@56.455,87.455 ; C1.2@56.951,63.351 C1.2 ; C9.2 57.55,94.761 59.489,96.7 70,96.7 U2.4@70,86.3 ; C8.2@60.3,58.6 C8.2@60.852,59.152 ; C2.2@60.852,61.552 61,61.7 C2.2 ; U3.1@62.3,83.7 U3.1 68.275,83.175 U2.4 ; C5.2@65.952,64.398 C5.2@66.15,64.2 ; C5.2 C5.2@66.15,64.2 ; C5.2@66.95,64.2 C5.2@66.15,64.2 ; U2.4@69.94,85.86 70.08,86 U2.4@71.26,87.18 ; R2.2@71.9,58.4 P1.2@74.9,58.4 ; 73.1,68.6 73.1,69.9 C3.2 C3.2@73.2,69.9
  Top Layer w1: C6.2 43.8,71.68 44.62,72.5 ; 44.3,76 42.9,76 41.8,74.9 41.8,63.9 38.5,60.6 38.5,57 38.9,56.6 58.051,56.6 58.6,57.149 58.6,60.5 60.852,60.5 ; 44.6,75.7 44.6,76.2 44.6,83.2 47.43,83.2 ; 44.62,76.2 44.62,75.7 44.62,72.5 ; 44.72,72.4 44.62,72.5 ; S1.4 47.43,83.17 47.5,83.1 50.9,83.1 52.4,83.1 52.5,83.2 C10.2@52.5,83.5 ; C7.2 56.8,62.7 ; C1.2@56.951,63.351 56.951,62.7 ; 58.5,60.5 56.949,60.5 56.8,60.649 56.8,62.7 ; C8.2@60.852,59.152 60.852,60.5 ; C2.2@60.852,61.552 60.852,60.5 ; C2.2@61,61.7 61,60.5 60.852,60.5 ; C2.2 62.85,62 64.25,63.4 C5.2 66.95,61.25 67.943,60.257 71.9,60.257 R2.2@71.9,58.4 ; C5.2@66.95,64.2 68.7,64.2 v1(69.8,65.3) 73.1,68.6 ; U2.4@70,86 70.08,86 76.08,86 P2.1 P2.2 P2.3 ; C4.2@73.2,66.7 73.2,68.6 C3.2@73.2,69.9 ; 56.8,62.7 56.951,62.7 ; 56.8,62.7 56.8,62.851 56.951,62.7
  Bottom Layer w0.254: R29.1@73.9,86.9 R29.1@74,86.8
  Bottom Layer w1: v1(69.8,65.3) 69.8,65.6 73,68.8 73,86.351 73.446,86.797 76.877,86.797 P2.1 P2.2 P2.3
MISO: R10.1 R31.1 U1.16 | length 40.5
  Top Layer w0.254: U1.16 55,66.45 55.5,65.95 v1(55.5,64.1)
  Bottom Layer w0.254: R31.1 66.2,81.7 66.9,81 66.9,69.063 65.621,67.784 63.284,67.784 59.561,64.061 55.539,64.061 v1(55.5,64.1) 55.5,63.4 56,62.9 56,60.827 ; 56,60.827 55.137,59.964 56,60.827
MOSI: R19.1 R28.1 U1.15 | length 41.5
  Top Layer w0.254: U1.15 54.2,65.167 54.267,65.167 54.533,64.9 v1(54.6,64.9)
  Bottom Layer w0.254: R19.1@52.4,59.8 R19.1@52.575,59.975 ; R28.1 63.7,83 66.108,80.592 66.108,68.99 65.41,68.292 62.292,68.292 62.1,68.1 62.1,67.766 58.903,64.569 56.929,64.569 56.598,64.9 v1(54.6,64.9) 54.6,62.4 53.173,60.973 53.173,60.123 R19.1@53.025,59.975 ; R19.1@52.575,59.975 R19.1@53.025,59.975 ; R19.1@52.575,59.975 R19.1@53.025,59.975
NetC1_1: C1.1 L1.1 U1.18 | length 13.5
  Top Layer w0.254: U1.18 57.241,69.2 58.3,68.141 v2(58.3,67.9) 58.3,66.35 58.057,66.107 57.25,65.3 C1.1 ; v2(60.3,68.453) 59.182,69.571 59.182,72.346 L1.1
  Bottom Layer w0.254: v2(58.3,67.9) 59.747,67.9 v2(60.3,68.453)
NetC2_1: C2.1 P7.2 P10.2 U1.20 | length 48.6
  Top Layer w0.254: v1(58,71.2) 57.933,71.2 57.59,70.857 56.457,70.857 U1.20 57.59,70.8 57.912,70.8 58.344,70.368 58.344,69.156 59.369,68.131 59.369,65.581 61.15,63.8 C2.1
  Top Layer w1: P7.2 51.35,93.853 51.37,93.873 P10.2
  Bottom Layer w0.254: P7.2@51.36,92.49 63.351,80.349 63.351,71.7 58.5,71.7 v1(58,71.2) ; P10.2@51.36,95.24 P10.2
  Bottom Layer w1: P7.2@51.36,92.49 P10.2@51.36,95.24
NetC6_1: C6.1 U1.7 Y1.2 | length 14.8
  Top Layer w0.254: Y1.2 43.05,68.35 43.427,68.727 43.427,68.752 43.775,69.1 C6.1 43.9,69.2 U1.7
NetC7_1: C7.1 U1.8 Y1.1 | length 24.5
  Top Layer w0.254: U1.8 47.1,68.4 ; Y1.1 52.55,62.45 C7.1 48.3,62.7 47.1,63.9 ; 47.1,63.9 47.1,68.4 ; 47.1,63.9 47.1,68.4 ; 47.1,63.9 47.1,68.4
NetC9_1: C9.1 C10.1 P6.1 P6.2 P6.3 U3.2 | length 25.4
  Top Layer w0.254: C10.1@54.1,83.3 55,83.3 56.9,85.2 60,85.2 ; U3.2 60,85.2 ; P6.3@62.5,95 62.45,94.95 C9.1 61.189,87.5 60,86.311 60,85.2
  Bottom Layer w1: P6.3 P6.2 P6.1
NetD1_1: D1.1 P1.1 | length 3.8
  Bottom Layer w1: D1.1 72.695,54.6 73.795,55.7 74.5,55.7
NetD2_2: D2.2 R2.1 | length 9.3
  Top Layer w0.254: D2.2 D2.2@66.9,58.5 ; D2.2@66.9,58.5 R2.1@69.9,58.5 ; D2.2@66.9,58.5 R2.1@69.9,58.5 ; D2.2@66.9,58.5 69.8,58.5 R2.1@69.9,58.5
NetD3_1: D3.1 R1.1 | length 3.9
  Top Layer w0.254: R1.1 62.925,70.6 64.4,69.125 D3.1
NetP5_1: P5.1 P9.1 R24.2 | length 14.4
  Top Layer w1: P9.1 P5.1
  Bottom Layer w1: 40.07,55.88 P5.1 40.07,54.102 40.1,54.072 40.1,52.8 40.08,52.82 40.08,54.102 40.08,54.24 P5.1@40.1,54.26 ; R24.2 40.1,56.78 40.1,55.92 ; P5.1@40.1,54.26 40.1,55.92 ; P5.1@40.1,54.26 40.1,55.92 ; P5.1@40.1,54.26 40.1,54.61 40.1,55.92
NetP5_2: P5.2 P9.2 R17.2 | length 13.6
  Top Layer w1: P9.2 P5.2
  Bottom Layer w1: 42.6,55.92 R17.2 ; 42.61,53.34 P9.2@42.61,52.807 ; P9.2@42.64,52.8 42.64,53.34 42.65,53.35 ; P9.2@42.61,52.807 P9.2@42.64,52.807 ; P9.2@42.61,52.807 P9.2@42.64,52.807 ; P9.2@42.61,52.807 P9.2@42.64,52.807 ; 42.65,53.35 42.65,55.87 ; 42.65,53.35 42.65,55.87 ; 42.65,53.35 42.65,54.61 42.65,55.87
NetP5_3: P5.3 P9.3 R9.2 | length 18.2
  Top Layer w1: P9.3 P5.3
  Bottom Layer w1: 45.15,53.34 P9.3@45.15,52.807 ; P9.3@45.18,52.8 45.18,53.34 45.19,53.35 ; P9.3@45.15,52.807 P9.3@45.18,52.807 ; P9.3@45.15,52.807 P9.3@45.18,52.807 ; P9.3@45.15,52.807 P9.3@45.18,52.807 ; 45.16,55.9 R9.2@45.16,58.2 ; 45.16,55.9 R9.2@45.16,58.2 ; 45.16,55.9 R9.2@45.16,58.2 ; 45.19,53.35 45.19,55.87 ; 45.19,53.35 45.19,55.87 ; 45.19,53.35 45.19,54.61 45.19,55.87
NetP5_4: P5.4 P9.4 R18.2 | length 13.9
  Top Layer w1: P9.4 P5.4
  Bottom Layer w1: 47.69,53.34 P9.4@47.69,52.807 ; P9.4@47.72,52.8 47.72,53.34 47.73,53.35 ; 47.8,55.5 R18.2@47.8,58.1 ; P9.4@47.69,52.807 P9.4@47.72,52.807 ; P9.4@47.69,52.807 P9.4@47.72,52.807 ; P9.4@47.69,52.807 P9.4@47.72,52.807 ; 47.73,53.35 47.73,55.87 ; 47.73,53.35 47.73,55.87 ; 47.73,53.35 47.73,54.61 47.73,55.87
NetP5_5: P5.5 P9.5 R25.2 | length 13.5
  Top Layer w1: P9.5 P5.5
  Bottom Layer w1: 50.23,53.34 P9.5@50.23,52.807 ; 50.24,55.9 R25.2@50.24,58.16 ; P9.5@50.26,52.8 50.26,53.34 50.27,53.35 ; P9.5@50.23,52.807 P9.5@50.26,52.807 ; P9.5@50.23,52.807 P9.5@50.26,52.807 ; P9.5@50.23,52.807 P9.5@50.26,52.807 ; 50.27,53.35 50.27,55.87 ; 50.27,53.35 50.27,55.87 ; 50.27,53.35 50.27,54.61 50.27,55.87
NetP5_6: P5.6 P9.6 R19.2 | length 18.2
  Top Layer w1: P9.6 P5.6
  Bottom Layer w1: 52.77,53.34 P9.6@52.77,52.807 ; P9.6@52.8,52.8 52.8,53.34 52.81,53.35 ; P9.6@52.77,52.807 P9.6@52.8,52.807 ; P9.6@52.77,52.807 P9.6@52.8,52.807 ; P9.6@52.77,52.807 P9.6@52.8,52.807 ; 52.78,55.9 R19.2@52.78,58.2 ; 52.78,55.9 R19.2@52.78,58.2 ; 52.78,55.9 R19.2@52.78,58.2 ; 52.81,53.35 52.81,55.87 ; 52.81,53.35 52.81,55.87 ; 52.81,53.35 52.81,54.61 52.81,55.87
NetP5_7: P5.7 P9.7 R10.2 | length 18.2
  Top Layer w1: P9.7 P5.7
  Bottom Layer w1: 55.31,53.34 P9.7@55.31,52.807 ; P9.7@55.34,52.8 55.34,53.34 55.35,53.35 ; P9.7@55.31,52.807 P9.7@55.34,52.807 ; P9.7@55.31,52.807 P9.7@55.34,52.807 ; P9.7@55.31,52.807 P9.7@55.34,52.807 ; 55.32,55.9 R10.2@55.32,58.2 ; 55.32,55.9 R10.2@55.32,58.2 ; 55.32,55.9 R10.2@55.32,58.2 ; 55.35,53.35 55.35,55.87 ; 55.35,53.35 55.35,55.87 ; 55.35,53.35 55.35,54.61 55.35,55.87
NetP5_8: P5.8 P9.8 R20.2 | length 18.5
  Top Layer w1: P9.8 P5.8
  Bottom Layer w1: P9.8 57.85,53.34 57.88,53.31 ; R20.2@57.96,58.2 R20.2@58,58.2 ; 57.86,55.9 R20.2@57.86,58.2 ; 57.86,55.9 R20.2@57.86,58.2 ; 57.86,55.9 R20.2@57.86,58.2 ; 57.88,53.325 57.88,55.88 ; 57.88,53.325 57.88,55.88 ; 57.88,53.325 57.88,54.61 57.88,55.88
NetP7_1: P7.1 P10.1 R4.2 | length 34.7
  Top Layer w1: P7.1 53.89,93.853 53.91,93.873 P10.1
  Bottom Layer w0.254: P7.1 53.89,90.71 64.2,80.4 R4.2 ; P10.1@53.89,95.25 P10.1
  Bottom Layer w1: P7.1 53.89,95.25 P7.1
NetP7_3: P7.3 P10.3 R3.2 | length 40.7
  Top Layer w0.254: P7.3@49.51,92.48 P7.3@49.52,92.49 ; P10.3@49.52,95.24 P10.3@49.53,95.25
  Top Layer w1: P7.3@48.82,92.49 P10.3@48.82,95.24
  Bottom Layer w0.254: 48.8,91.02 49.804,90.016 51.584,90.016 54.784,86.816 55.784,86.816 61.7,80.9 61.7,73.85 62.4,73.15 R3.2
  Bottom Layer w1: 48.83,91.02 P10.3 ; 48.83,91.02 P10.3 ; 48.83,91.02 48.83,92.48 P10.3
NetP7_4: P7.4 P10.4 R5.2 | length 37.7
  Top Layer w0.254: P7.4@46.97,92.48 P7.4@46.98,92.49 ; P10.4@46.98,95.24 P10.4@46.99,95.25
  Top Layer w1: P7.4@46.28,92.49 P10.4@46.28,95.24
  Bottom Layer w0.254: 46.3,91.3 46.3,89.508 50.892,89.508 54.092,86.308 55.192,86.308 60.6,80.9 R5.2
  Bottom Layer w1: 46.27,91 P7.4 ; P7.4 P10.4@46.27,95.25 ; P7.4 P10.4@46.27,95.25 ; P7.4 P10.4@46.27,95.25
NetP7_5: P7.5 P10.5 R11.2 | length 35.8
  Top Layer w0.254: P7.5@44.43,92.48 P7.5@44.44,92.49 ; P10.5@44.44,95.24 P10.5@44.45,95.25
  Top Layer w1: P7.5@43.74,92.49 P10.5@43.74,95.24
  Bottom Layer w0.254: 43.9,91.2 43.9,90.47 45.37,89 50.3,89 53.5,85.8 54.6,85.8 58.8,81.6 R11.2
  Bottom Layer w1: 43.73,91 P7.5 ; P7.5 P10.5@43.73,95.25 ; P7.5 P10.5@43.73,95.25 ; P7.5 P10.5@43.73,95.25
NetP7_6: P7.6 P10.6 R21.2 | length 34.9
  Top Layer w0.254: P7.6@41.89,92.48 P7.6@41.9,92.49 ; P10.6@41.9,95.24 P10.6@41.91,95.25
  Top Layer w1: P7.6@41.2,92.49 P10.6@41.2,95.24
  Bottom Layer w0.254: 41.19,91 41.19,89.81 42.2,88.8 44,88.8 44.5,88.3 50,88.3 53.224,85.076 54.324,85.076 57,82.4 R21.2
  Bottom Layer w1: 41.19,91 P7.6 ; P7.6 P10.6@41.19,95.25 ; P7.6 P10.6@41.19,95.25 ; P7.6 P10.6@41.19,95.25
NetP8_1: P8.1 P11.1 R16.2 | length 12.4
  Top Layer w1: P11.1 P8.1
  Bottom Layer w0.254: P8.1@39.35,64.75 P8.1
  Bottom Layer w1: P8.1@39.4,64.7 R16.2 ; P11.1@36.83,64.75 P8.1@39.35,64.75 ; P11.1@36.83,64.75 P8.1@39.35,64.75 ; P11.1@36.83,64.75 P8.1@39.35,64.75
NetP8_2: P8.2 P11.2 R8.2 | length 9.1
  Top Layer w1: P11.2 P8.2
  Bottom Layer w0.254: P8.2@39.36,67.3 P8.2 ; R8.2 41.44,67.24 R8.2@41.428,67.269 ; P11.2@36.27,67.29 P11.2@36.83,67.29 ; P11.2@36.27,67.29 P11.2@36.83,67.29 ; P11.2@36.27,67.29 P11.2@36.83,67.29 ; R8.2@41.41,67.31 R8.2@41.428,67.269 ; R8.2@41.41,67.31 R8.2@41.428,67.269 ; R8.2@41.41,67.31 R8.2@41.428,67.269
  Bottom Layer w1: P8.2@39.36,67.3 P11.2@36.84,67.3 ; P8.2 R8.2@41.41,67.31 ; P11.2@36.83,67.29 P11.2@36.84,67.3 ; P11.2@36.83,67.29 P11.2@36.84,67.3 ; P11.2@36.83,67.29 P11.2@36.84,67.3
NetP8_3: P8.3 P11.3 R15.2 | length 8.9
  Top Layer w1: P11.3 P8.3
  Bottom Layer w0.254: P8.3@39.36,69.84 P8.3 P8.3@39.49,69.97 ; P11.3@36.27,69.83 P11.3@36.83,69.83 ; P11.3@36.27,69.83 P11.3@36.83,69.83 ; P11.3@36.27,69.83 P11.3@36.83,69.83
  Bottom Layer w1: P8.3@39.36,69.84 P11.3@36.84,69.84 ; P8.3@39.52,69.9 R15.2 ; P11.3@36.83,69.83 P11.3@36.84,69.84 ; P11.3@36.83,69.83 P11.3@36.84,69.84 ; P11.3@36.83,69.83 P11.3@36.84,69.84
NetP8_4: P8.4 P11.4 R23.2 | length 9.5
  Top Layer w1: P11.4 P8.4
  Bottom Layer w0.254: P11.4@36.504,72.136 P11.4@36.27,72.37 ; P8.4@39.216,72.136 P8.4@39.4,72.32 ; P8.4@39.36,72.38 P8.4 ; R23.2@41.48,72.32 R23.2 ; P11.4@36.27,72.37 P11.4@36.83,72.37 ; P11.4@36.27,72.37 P11.4@36.83,72.37 ; P11.4@36.27,72.37 P11.4@36.83,72.37
  Bottom Layer w1: P8.4@39.36,72.38 P11.4@36.84,72.38 ; P8.4@39.4,72.32 R23.2@41.48,72.32 ; P11.4@36.83,72.37 P11.4@36.84,72.38 ; P11.4@36.83,72.37 P11.4@36.84,72.38 ; P11.4@36.83,72.37 P11.4@36.84,72.38
NetP8_5: P8.5 P11.5 R14.2 | length 9.1
  Top Layer w1: P11.5 P8.5
  Bottom Layer w0.254: P8.5@39.36,74.92 P8.5 ; R14.2 R14.2@41.46,74.86 ; P11.5@36.27,74.91 P11.5@36.83,74.91 ; P11.5@36.27,74.91 P11.5@36.83,74.91 ; P11.5@36.27,74.91 P11.5@36.83,74.91 ; R14.2@41.43,74.93 R14.2@41.452,74.879 ; R14.2@41.43,74.93 R14.2@41.452,74.879 ; R14.2@41.43,74.93 R14.2@41.452,74.879 ; R14.2@41.452,74.879 R14.2@41.46,74.86 ; R14.2@41.452,74.879 R14.2@41.46,74.86 ; R14.2@41.452,74.879 R14.2@41.46,74.86
  Bottom Layer w1: P8.5@39.36,74.92 P11.5@36.84,74.92 ; P8.5 R14.2@41.43,74.93 ; P11.5@36.83,74.91 P11.5@36.84,74.92 ; P11.5@36.83,74.91 P11.5@36.84,74.92 ; P11.5@36.83,74.91 P11.5@36.84,74.92
NetP8_6: P8.6 P11.6 R7.2 | length 9
  Top Layer w1: P11.6 P8.6
  Bottom Layer w0.254: P8.6@39.36,77.46 P8.6 ; R7.2@41.37,77.47 41.379,77.448 41.4,77.4 R7.2 ; P11.6@36.27,77.45 P11.6@36.83,77.45 ; P11.6@36.27,77.45 P11.6@36.83,77.45 ; P11.6@36.27,77.45 P11.6@36.83,77.45
  Bottom Layer w1: P8.6@39.36,77.46 P11.6@36.84,77.46 ; P8.6 R7.2@41.37,77.47 ; P11.6@36.83,77.45 P11.6@36.84,77.46 ; P11.6@36.83,77.45 P11.6@36.84,77.46 ; P11.6@36.83,77.45 P11.6@36.84,77.46
NetP8_7: P8.7 P11.7 R13.2 | length 7.2
  Top Layer w1: P11.7 P8.7
  Bottom Layer w0.254: R13.2@41.49,80.01 R13.2
  Bottom Layer w1: P11.7 P8.7 R13.2@41.49,80.01
NetP8_8: P8.8 P11.8 R22.2 | length 7.2
  Top Layer w1: P11.8 P8.8
  Bottom Layer w0.254: R22.2@41.45,82.55 R22.2
  Bottom Layer w1: P11.8 P8.8 R22.2@41.45,82.55
NetP8_9: P8.9 P11.9 R6.2 | length 8.9
  Top Layer w1: P11.9 P8.9
  Bottom Layer w0.254: P8.9@39.36,85.08 P8.9 ; R6.2@41.48,85.02 R6.2 ; P11.9@36.27,85.07 P11.9@36.83,85.07 ; P11.9@36.27,85.07 P11.9@36.83,85.07 ; P11.9@36.27,85.07 P11.9@36.83,85.07
  Bottom Layer w1: P8.9@39.36,85.08 P11.9@36.84,85.08 ; P8.9@39.4,85.02 R6.2@41.48,85.02 ; P11.9@36.83,85.07 P11.9@36.84,85.08 ; P11.9@36.83,85.07 P11.9@36.84,85.08 ; P11.9@36.83,85.07 P11.9@36.84,85.08
NetP8_10: P8.10 P11.10 R12.2 | length 9
  Top Layer w1: P11.10 P8.10
  Bottom Layer w0.254: R12.2@41.54,87.56 R12.2 ; P11.10@36.27,87.61 P11.10@36.83,87.61 ; P11.10@36.27,87.61 P11.10@36.83,87.61 ; P11.10@36.27,87.61 P11.10@36.83,87.61
  Bottom Layer w1: P8.10 P11.10@36.85,87.63 ; P8.10@39.4,87.56 R12.2@41.54,87.56 ; P11.10@36.83,87.61 P11.10@36.85,87.63 ; P11.10@36.83,87.61 P11.10@36.85,87.63 ; P11.10@36.83,87.61 36.84,87.62 P11.10@36.85,87.63
NetR3_1: R3.1 U1.22 | length 4.7
  Top Layer w0.254: U1.22 56.45,72.45 58.15,72.45 v1(58.2,72.5)
  Bottom Layer w0.254: v1(58.2,72.5) 58.246,72.5 58.846,73.1 R3.1
NetR4_1: R4.1 U1.19 | length 6.4
  Top Layer w0.254: U1.19 v1(57.7,70)
  Bottom Layer w0.254: v1(57.7,70) 62.25,70 62.6,70.35 R4.1
NetR5_1: R5.1 U1.23 | length 3.9
  Top Layer w0.254: U1.23 56.457,73.257 57.457,73.257 57.9,73.7 v1(57.9,73.75)
  Bottom Layer w0.254: v1(57.9,73.75) 57.9,74.3 R5.1
NetR6_1: R6.1 U1.27 | length 25.2
  Top Layer w0.254: U1.27 53.453,75.453 53.453,76.953 v1(53.5,77)
  Bottom Layer w0.254: R6.1 R6.1@42.8,85 ; v1(53.5,77) 53.5,78.4 53.5,81 51.9,82.6 45.125,82.6 45.125,82.625 ; R6.1@42.8,84.95 45.125,82.625 ; R6.1@42.8,84.95 R6.1@42.8,85 ; R6.1@42.8,84.95 R6.1@42.8,85 ; R6.1@42.8,84.95 R6.1@42.925,84.825 ; R6.1@42.8,84.95 R6.1@42.925,84.825 ; R6.1@42.8,84.95 R6.1@42.8,85 ; R6.1@42.8,84.95 R6.1@42.925,84.825 ; R6.1@42.925,84.825 45.125,82.625 ; R6.1@42.925,84.825 45.125,82.625
NetR7_1: R7.1 U1.30 | length 9.9
  Top Layer w0.254: v1(50.8,77) 50.8,76.933 51,76.733 U1.30
  Bottom Layer w0.254: R7.1@42.8,77.5 R7.1 43.269,77.331 49.469,77.331 49.8,77 v1(50.8,77)
NetR8_1: R8.1 U1.2 | length 13.8
  Top Layer w0.254: v1(46.4,73.1) 46.447,73.147 47.947,73.147 U1.2
  Bottom Layer w0.254: R8.1@43.1,67.4 46.4,67.5 ; R8.1@43.1,67.408 46.4,67.5 ; v1(46.4,73.1) 46.4,67.5
NetR9_1: R9.1 U1.12 | length 17.3
  Top Layer w0.254: U1.12 51.8,66.37 51.9,66.27 v1(51.9,65.4)
  Bottom Layer w0.254: v1(51.9,65.4) 51.869,65.369 51.869,64.769 49,61.9 46.95,61.9 ; R9.1@44.85,59.8 46.95,61.9 ; R9.1@44.85,59.8 46.95,61.9 ; R9.1@44.85,59.8 45.025,59.975 46.95,61.9
NetR11_1: R11.1 U1.24 | length 4
  Top Layer w0.254: U1.24 56.6,74.2 v1(56.6,75.4)
  Bottom Layer w0.254: v1(56.6,75.4) 56.6,76.1 57.2,76.7 R11.1
NetR12_1: R12.1 U1.26 | length 26.6
  Top Layer w0.254: U1.26 v1(54.2,77.8)
  Bottom Layer w0.254: R12.1 R12.1@42.9,87.5 ; v1(54.2,77.8) 54.2,80.509 54.2,83.5 46.8,83.5 44.675,85.625 44.7,85.65 ; R12.1@42.9,87.45 44.7,85.65 ; R12.1@42.9,87.45 44.7,85.65 ; R12.1@42.9,87.45 R12.1@42.9,87.5 ; R12.1@42.9,87.45 R12.1@42.9,87.5 ; R12.1@42.9,87.45 43.025,87.325 44.7,85.65 ; R12.1@42.9,87.45 R12.1@42.9,87.5
NetR13_1: R13.1 U1.28 | length 12.6
  Top Layer w0.254: v1(46.4,78.3) 51.592,78.3 52.653,77.239 52.653,75.453 U1.28
  Bottom Layer w0.254: R13.1 43.1,79.95 44.75,78.3 v1(46.4,78.3)
NetR14_1: R14.1 U1.31 | length 8.8
  Top Layer w0.254: v1(48.6,76.7) 49.578,76.7 50.056,76.222 50.056,76.174 50.2,76.03 U1.31
  Bottom Layer w0.254: R14.1 43.1,74.95 43.95,75.8 46.5,75.8 47.4,76.7 v1(48.6,76.7)
NetR15_1: R15.1 U1.1 | length 13.7
  Top Layer w0.254: v1(46.5,74) v1@46.5,74.1 ; U1.1 47.947,74.053 46.647,74.053 v1@46.6,74.1 ; v1@46.5,74.1 v1@46.6,74.1 ; v1@46.5,74.1 v1@46.6,74.1 ; v1@46.5,74.1 v1@46.6,74.1
  Bottom Layer w0.254: R15.1 42.8,69.9 R15.1@42.9,70 ; v1(46.5,74) 46.1,74 45.1,73 45.1,70.1 45.1,70 ; R15.1@42.9,70 45.1,70 ; R15.1@42.9,70 45.1,70 ; R15.1@42.9,70 43.1,70 45.1,70
NetR16_1: R16.1 U1.9 | length 7.5
  Top Layer w0.254: v1(48.5,65.6) 48.525,65.6 49.4,66.475 U1.9
  Bottom Layer w0.254: R16.1 43.35,64.7 43.55,64.5 45.2,64.5 47.4,64.5 v1(48.5,65.6)
NetR17_1: R17.1 U1.11 | length 18.3
  Top Layer w0.254: v1(50.6,65.2) 50.6,65.267 51,65.667 U1.11
  Bottom Layer w0.254: v1(50.6,65.2) 50.4,65 50.4,64.3 48.7,62.6 46.3,62.6 45.4,61.7 44.2,61.7 ; R17.1@42.3,59.8 R17.1@42.45,59.95 ; R17.1@42.3,59.8 R17.1@42.45,59.95 ; R17.1@42.3,59.8 R17.1@42.45,59.95 ; R17.1@42.45,59.95 44.2,61.7 ; R17.1@42.45,59.95 44.2,61.7 ; R17.1@42.45,59.95 44.2,61.7
NetR18_1: R18.1 U1.13 | length 9.9
  Top Layer w0.254: v1(52.5,64.7) 52.531,64.731 52.531,65.661 52.5,65.692 52.5,66.9 U1.13
  Bottom Layer w0.254: R18.1 47.8,60.5 48.5,61.2 49.6,61.2 52.469,64.069 52.469,64.669 v1(52.5,64.7)
NetR21_1: R21.1 U1.25 | length 4.9
  Top Layer w0.254: U1.25 v1(55,77.2)
  Bottom Layer w0.254: v1(55,77.2) 55.4,77.6 R21.1
NetR23_1: R23.1 U1.32 | length 7.8
  Top Layer w0.254: v1(48.2,75.6) 49.263,75.6 49.4,75.463 U1.32
  Bottom Layer w0.254: R23.1 45.8,75 47.6,75 v1(48.2,75.6)
NetR24_1: R24.1 U1.10 | length 22
  Top Layer w0.254: v1(49.5,64.8) 49.547,64.847 49.547,65.209 50.143,65.805 50.143,66.943 U1.10
  Bottom Layer w0.254: R24.1@39.7,59.5 R24.1@40.05,59.85 ; v1(49.5,64.8) 49.2,64.8 47.8,63.4 45.6,63.4 44.7,62.5 42.7,62.5 ; R24.1@40.05,59.85 42.7,62.5 ; R24.1@40.05,59.85 42.7,62.5 ; R24.1@40.05,59.85 42.7,62.5
NetR25_1: R25.1 U1.14 | length 24.5
  Top Layer w0.254: U1.14 53.369,66.969 53.369,64.831 v1(53.6,64.6)
  Bottom Layer w0.254: v1(53.6,64.6) 53.6,63.5 ; R25.1@49.9,59.8 53.6,63.5 ; R25.1@49.9,59.8 R25.1@50.05,59.95 ; R25.1@49.9,59.8 R25.1@50.05,59.95 ; R25.1@49.9,59.8 R25.1@50.05,59.95 ; R25.1@50.05,59.95 53.6,63.5 ; R25.1@50.05,59.95 53.6,63.5 ; R25.1@50.05,59.95 53.6,63.5
NetR26_2: R26.2 USBASP.2 | length 4.1
  Bottom Layer w0.254: R26.2@71.34,88.46 R26.2@71.4,88.4 ; R26.2@71.34,88.46 R26.2@71.4,88.4 ; R26.2@71.34,88.46 71.35,88.45 R26.2@71.4,88.4
  Bottom Layer w1: R26.2@71.34,88.46 USBASP.2
NetR27_2: R27.2 USBASP.3 | length 3.9
  Bottom Layer w1: R27.2 USBASP.3
NetR28_2: R28.2 USBASP.5 | length 3.9
  Bottom Layer w0.254: R28.2 R28.2@63.72,88.42
  Bottom Layer w1: R28.2@63.72,88.42 USBASP.5
NetR29_2: R29.2 USBASP.1 | length 3.8
  Bottom Layer w0.254: USBASP.1 USBASP.1@74,92.18
  Bottom Layer w1: R29.2@73.9,88.5 USBASP.1@73.9,92.18
NetR30_2: R30.2 USBASP.6 | length 3.9
  Bottom Layer w0.254: R30.2@61.18,88.42 R30.2
  Bottom Layer w1: R30.2@61.18,88.42 USBASP.6
NetR31_2: R31.2 USBASP.4 | length 3.9
  Bottom Layer w0.254: R31.2@66.26,88.44 R31.2@66.3,88.4
  Bottom Layer w1: R31.2@66.26,88.44 USBASP.4
Reset: D3.2 R22.1 R30.1 S1.1 U1.29 | length 54.7
  Top Layer w0.254: v2(51.8,73.736) U1.29 v1(51.8,77.2) ; v2(60.9,69.2) 60.9,69.084 62.484,67.5 D3.2@62.5,67.5
  Bottom Layer w0.254: R22.1 43.1,82.45 43.423,82.127 44.073,82.127 45.2,81 47.19,81 S1.1 48.228,79.962 48.228,79.072 48.9,78.4 50.6,78.4 v1(51.8,77.2) ; v2(51.8,73.736) 51.8,70.1 52.7,69.2 v2(60.9,69.2) 61.3,68.8 65.2,68.8 65.4,69 65.4,71.7 65,72.1 65,80.5 61.2,84.3 R30.1
SCK: R20.1 R27.1 U1.17 | length 41.7
  Top Layer w0.254: U1.17 56.816,68.4 56.953,68.263 56.953,67.347 56.6,66.994 v1(56.6,66.9) ; v1(58.6,65.2) 58.6,61.867 58.8,61.667 v1(58.8,61.6)
  Bottom Layer w0.254: v1(56.6,66.9) 56.6,66.1 57,65.7 58.1,65.7 v1(58.6,65.2) ; R20.1 57.95,59.8 58.8,60.65 v1(58.8,61.6) 58.831,61.631 58.831,62.231 63.8,67.2 65.8,67.2 68.8,70.2 R27.1
pads on no net: S1.2 S1.3 U2.2 U3.4
copper on no net: | length 184
  Top Layer w0.254: 35,50 35,97.5 79.5,97.5 79.5,50 35,50
  other v3: 37,52 77.2,52 37,95.3 77.2,95.3

## Silkscreen, mask and mechanical layers (free items; w line width, h text height)
Bottom Overlay:
  text "mega48_sboard" at 75.2,62.9 h1.52
  text "ver.01_19/11/12" at 75.5,60.7 h1.52